# Altium PCB Interface Board.PcbDoc
Units mm, origin at the board's own origin, x right, y up, seen from the top; angles counter-clockwise.
Board outline 152.4 x 101.6 mm, 2 copper layers (Top Layer, Bottom Layer); 21 components, 170 nets, 84 pads, 0 vias.
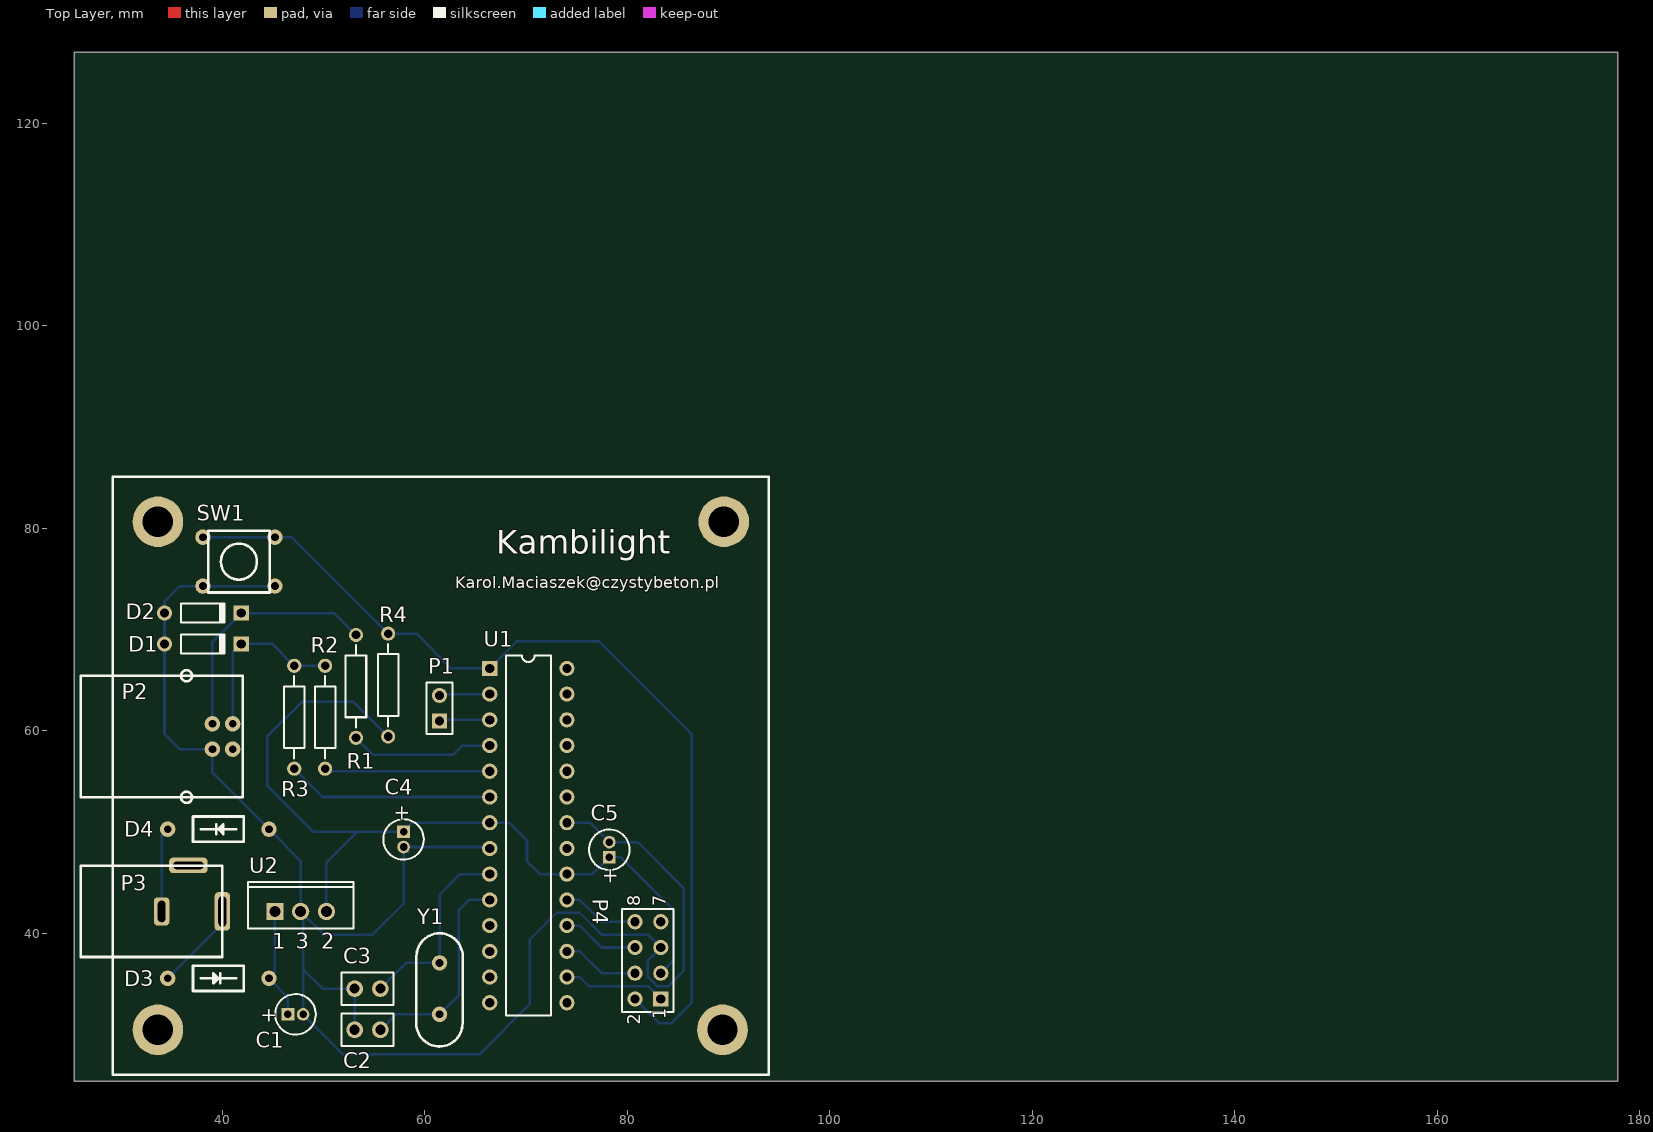
[diagram p0: Top Layer view]
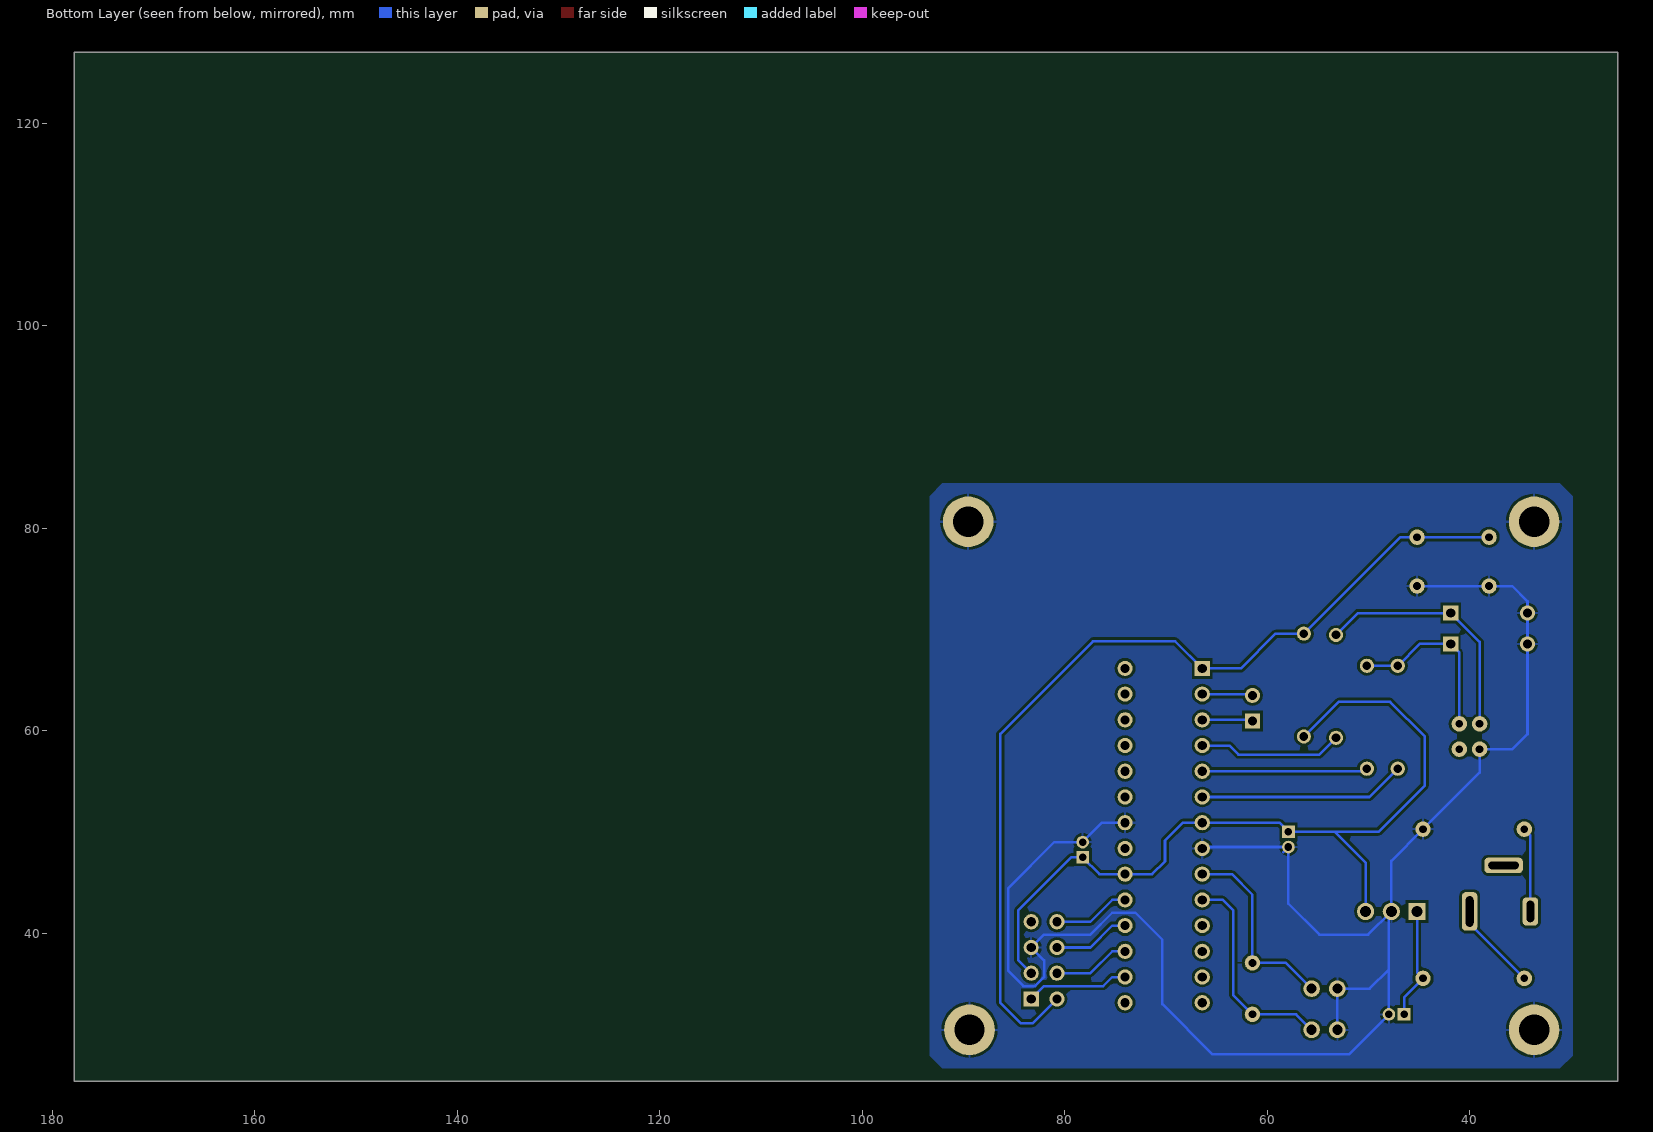
[diagram p1: Bottom Layer view, seen from below]

## Layer stack, top to bottom
Top Layer: signal copper 0.0356
Dielectric: dielectric 0.32, FR-4, Dk 4.8
Bottom Layer: signal copper 0.0356

## Board outline
25.4,25.4 177.8,25.4 177.8,127 25.4,127

## Design rules (kind name [scope] priority, off if disabled: settings)
Clearance [All] p1: gap=0.254
PolygonConnect [All] p1: connectstyle=Relief reliefconductorwidth=0.254 reliefentries=4 polygonreliefangle="90 Angle"
RoomDefinition "USB Circuit" [InComponentClass('USB Circuit')] p1: confinementstyle=ConfineIn formatcopy=TRUE lockcomponents=FALSE outline 25.4,25.4 94.488,25.4 94.488,85.471 25.4,85.471
RoomDefinition Reset [InComponentClass('Reset')] p2: confinementstyle=ConfineIn formatcopy=TRUE lockcomponents=FALSE outline 31.115,58.42 58.547,58.42 58.547,85.471 31.115,85.471
RoomDefinition Power [InComponentClass('Power')] p3: confinementstyle=ConfineIn formatcopy=TRUE lockcomponents=FALSE outline 25.4,28.067 54.229,28.067 54.229,53.213 25.4,53.213
RoutingVias [All] p1: holewidth=0.711 width=1.27 viastyle="Through Hole" minholewidth=0.711 minwidth=1.27 maxholewidth=0.711 maxwidth=1.27
SilkscreenOverComponentPads [All] p1: minsilkscreentomaskgap=0.254
SolderMaskExpansion [All] p1: expansion=0.102
Width [All] p1: maxlimit=0.254 minlimit=0.254 preferedwidth=0.254
27 further rules are at their usual default settings.

## Classes and differential pairs
component class Power: C1 D3 D4 P3 U2
component class Reset: R4 SW1
component class "USB Circuit": C2 C3 C4 C5 D1 D2 P1 P2 P4 R1 R2 R3 U1 Y1

## Components (designator, comment, footprint, x,y, rotation, side; value= is the part's Value field where it differs from the comment)
C1 "Cap Pol1" CAPPR1.5-4x5 47.244,32.004 r0 top
C2 "Cap" CAPR2.54-5.1x3.2 54.356,30.48 r180 top
C3 "Cap" CAPR2.54-5.1x3.2 54.356,34.544 r180 top
C4 "Cap Pol1" CAPPR1.5-4x5 57.912,49.276 r270 top
C5 "Cap Pol1" CAPPR1.5-4x5 78.232,48.26 r90 top
D1 "BZX79-C3V6" SOD27 38.1,68.58 r0 top
D2 "BZX79-C3V6" SOD27 38.1,71.628 r0 top
D3 "1N5817" 1N5817 39.624,35.56 r180 top
D4 "1N5817" 1N5817 39.624,50.292 r0 top
P1 "Header 2" HDR1X2 61.468,60.96 r90 top
P2 "USB B Socket" "USB B Socket" 34.036,59.436 r0 top
P3 "PWR Socket 6mm" "PWR Socket 6mm" 33.02,42.164 r0 top
P4 "Header 4X2" HDR2X4 83.312,33.528 r90 top
R1 "Res2" AXIAL-0.4 53.213,64.389 r270 top
R2 "Res2" AXIAL-0.4 50.165,61.341 r90 top
R3 "Res2" AXIAL-0.4 47.117,61.341 r270 top
R4 "Res2" AXIAL-0.4 56.388,64.516 r270 top
SW1 "Microswitch" "DIP Microswitch 6x6mm" 41.656,76.708 r0 top
U1 "ATmega8-16PI" 28P3 70.231,49.657 r270 top
U2 "L7805CV" TO220ABN 47.752,42.164 r0 top
Y1 "XTAL" "Crystal Oscillator" 61.468,34.544 r270 top

## Footprints (in the part's own frame and the unit in brackets; to place one, negate y for a bottom-side part, rotate by r counter-clockwise, add the part's x,y. Pads: shape width x height; smd on the part's side, far side on the other; paste and mask are expansions set on the pad)
1N5817 [mil]
  round 60 hole 30: A(196.85,0) K(-196.85,0)
  silkscreen extent -98,-49 98,49
28P3 [mm] "DIP; 28 Leads; Row Spacing 7.62 mm; Pitch 2.54 mm"
  rect 1.5x1.5 hole 0.9: 1(-16.51,-3.81)
  round 1.5 hole 0.9: 2(-13.97,-3.81) 3(-11.43,-3.81) 4(-8.89,-3.81) 5(-6.35,-3.81) 6(-3.81,-3.81) 7(-1.27,-3.81) 8(1.27,-3.81) 9(3.81,-3.81) 10(6.35,-3.81) 11(8.89,-3.81) 12(11.43,-3.81) 13(13.97,-3.81) 14(16.51,-3.81) 15(16.51,3.81) 16(13.97,3.81) 17(11.43,3.81) 18(8.89,3.81) 19(6.35,3.81) 20(3.81,3.81) 21(1.27,3.81) 22(-1.27,3.81) 23(-3.81,3.81) 24(-6.35,3.81) 25(-8.89,3.81) 26(-11.43,3.81) 27(-13.97,3.81) 28(-16.51,3.81)
  silkscreen extent -17.78,-2.22 17.78,2.22
AXIAL-0.4 [mm] "Axial Device, Thru-Hole; 2 Leads; 0.4 in Pin Spacing"
  round 1.4 hole 0.85: 1(-5.08,0) 2(5.08,0)
  silkscreen extent -4.06,-1.02 4.06,1.02
CAPPR1.5-4x5 [mm] "Capacitor, Electrolytic, Radial; Body 4 x 5 mm (Dia.xH typ); Pin Spacing 1.5 mm (typ)"
  rect 1.25x1.25 hole 0.75: 1(-0.75,0)
  round 1.25 hole 0.75: 2(0.75,0)
  silkscreen extent -2,-2 2,2
CAPR2.54-5.1x3.2 [mm] "Capacitor, Ceramic, Thru-Hole, Dipped Radial; Body 5.1 x 3.2 mm (WxT) Pin Spacing 2.54 mm (typ)"
  round 1.65 hole 1: 1(-1.27,0) 2(1.27,0)
  silkscreen extent -2.55,-1.6 2.55,1.6
"Crystal Oscillator" [mil]
  round 60 hole 30: 1(-100,0) 2(100,0)
  silkscreen extent -215,-91 225,90
"DIP Microswitch 6x6mm" [mil]
  round 60 hole 30: 1(-140,95) 1(140,95) 2(-140,-95) 2(140,-95)
  silkscreen extent -120,-120 120,120
HDR1X2 [mm] "Connector; Header; 2 Position"
  rect 1.5x1.5 hole 0.9: 1(0,0)
  round 1.5 hole 0.9: 2(2.54,0)
  silkscreen extent -1.27,-1.27 3.81,1.27
HDR2X4 [mm] "Connector; Header; 4x2 Position"
  rect 1.5x1.5 hole 0.9: 1(0,0)
  round 1.5 hole 0.9: 2(0,2.54) 3(2.54,0) 4(2.54,2.54) 5(5.08,0) 6(5.08,2.54) 7(7.62,0) 8(7.62,2.54)
  silkscreen extent -1.27,-1.27 8.89,3.81
"PWR Socket 6mm" [mm]
  rrect50% 1.524x3.8 hole 0.762 slot 3 at 90 deg: +(7,0)
  rrect50% 1.524x2.8 hole 0.762 slot 2.1 at 90 deg: -(1,0)
  rrect50% 3.8x1.524 hole 0.762 slot 3 at 0 deg: ""(3.65,4.55)
  silkscreen extent -7,-4.5 7,4.5
SOD27 [mm] "Diode, Axial; Body 4.3 x 1.9 mm (LxDia. max), Lead Dia. 0.56 mm (max)"
  round 1.5 hole 0.9: 1(-3.79,0)
  rect 1.5x1.5 hole 0.9: 2(3.79,0)
  silkscreen extent -2.15,-0.95 2.25,0.95
TO220ABN [mm] "TO, Thru-Hole, Vertical, Heatsink Mounted; 3 In-Line Leads; Pitch 2.54 mm; Pin sequence 1, 3, 2"
  rect 1.7x1.7 hole 1.1: 1(-2.54,0)
  round 1.7 hole 1.1: 2(2.54,0) 3(0,0)
  silkscreen extent -5.2,-1.7 5.2,2.9
"USB B Socket" [mil]
  round 60 hole 30: D+(196.85,49.21) D-(275.59,49.21) GND(196.85,-49.21) VCC(275.59,-49.21)
  silkscreen extent -315,-258 315,258

## Part data
C1 C4 C5: "Polarized Capacitor (Radial)"
C2 C3: "Capacitor"
D1 D2: "Voltage Regulator Diode"
P1: "Header, 2-Pin"
P4: "Header, 4-Pin, Dual row"
R1 R2 R3 R4: "Resistor"
U1: "8-Bit AVR Microcontroller with 8K Bytes of In-System Programmable Flash Memory"
U2: "Positive Voltage Regulator"
Y1: library part "Crystal Oscillator"

## Free pads (board coordinates)
  round 5 hole 3: 0(33.655,30.48) 1(33.655,80.645) 2(89.408,30.48) 3(89.535,80.645)

## Nets (pads, with @x,y where several pads share a name; then routed paths per layer and width w, separated by ;. In a path a pad name is that pad's centre, name@x,y a point inside that pad or via, vN(x,y) a via of type N, cw(c..) or ccw(c..) an arc to the next point about the centre after c; other vN are vias at no path point)
GND: C1.2 C2.2 C3.2 C4.2 C5.2 D1.1 D2.1 D4.A P2.GND P4.5 pad.0 pad.1 pad.2 pad.3 SW1.2 U1.8 U1.22 U2.3 | length 175.4
  Bottom Layer w0.254: SW1.2@45.212,74.295 38.1,74.295 35.814,74.295 34.31,72.791 D2.1 D1.1 34.31,59.67 35.794,58.186 P2.GND 39.036,55.88 D4.A 47.752,47.164 U2.3 ; C2.2 C3.2 49.899,34.544 47.994,36.449 ; 58.432,48.006 C4.2 ; U1.8 66.282,48.526 C4.2 ; U1.22 76.315,50.927 C5.2 81.038,49.01 85.598,44.45 85.598,36.322 84.074,34.798 82.931,34.798 82.042,35.687 82.042,37.338 P4.5 82.042,39.878 77.47,39.878 75.311,42.037 73.025,42.037 70.358,39.37 70.358,33.02 65.393,28.055 51.943,28.055 C1.2 47.994,36.449 ; U2.3 47.994,41.922 47.994,36.449 ; U2.3 50.038,39.878 54.864,39.878 57.912,42.926 C4.2
NetC1_1: C1.1 D3.K U2.1 | length 11.2
  Bottom Layer w0.254: U2.1 45.212,36.148 D3.K 46.494,33.69 C1.1
NetC2_1: C2.1 U1.10 Y1.2 | length 21
  Bottom Layer w0.254: C2.1 57.15,32.004 Y1.2 63.373,33.909 63.373,42.291 64.389,43.307 U1.10
NetC3_1: C3.1 U1.9 Y1.1 | length 19.4
  Bottom Layer w0.254: C3.1 58.166,37.084 Y1.1 61.468,43.815 63.5,45.847 U1.9
NetC6_1: 
NetC7_1: 
NetD1_2: D1.2 P2.D- R2.2 R3.1 | length 17.4
  Bottom Layer w0.254: P2.D- 41.036,67.726 D1.2 44.958,68.58 R3.1 R2.2
NetD2_2: D2.2 P2.D+ R1.1 | length 24.3
  Bottom Layer w0.254: P2.D+ 39.036,68.774 D2.2 51.054,71.628 R1.1
NetD3_A: D3.A P3.+ | length 8.8
  Bottom Layer w0.254: D3.A 40.02,40.956 P3.+
NetD4_K: D4.K P3.- | length 8.4
  Bottom Layer w0.254: P3.- 34.02,49.688 D4.K
NetP1_1: P1.1 U1.3 | length 5
  Bottom Layer w0.254: P1.1 61.595,61.087 U1.3
NetP1_2: P1.2 U1.2 | length 5
  Bottom Layer w0.254: P1.2 61.595,63.627 U1.2
NetP4_1: P4.1 U1.16 | length 10.2
  Bottom Layer w0.254: U1.16 75.311,35.687 76.2,34.798 82.042,34.798 P4.1
NetP4_2: P4.2 R4.1 SW1.1 U1.1 | length 92.5
  Bottom Layer w0.254: SW1.1@38.1,79.121 45.212,79.121 46.863,79.121 R4.1 59.182,69.596 62.611,66.167 U1.1 69.088,68.834 77.216,68.834 86.36,59.69 86.36,33.147 84.328,31.115 83.185,31.115 P4.2
NetP4_4: P4.4 U1.17 | length 7.6
  Bottom Layer w0.254: U1.17 75.311,38.227 77.47,36.068 P4.4
NetP4_6: P4.6 U1.18 | length 7.6
  Bottom Layer w0.254: U1.18 75.311,40.767 77.47,38.608 P4.6
NetP4_8: P4.8 U1.19 | length 7.6
  Bottom Layer w0.254: U1.19 75.311,43.307 77.47,41.148 P4.8
NetP5_1: 
NetP5_2: 
NetP5_4: 
NetP5_6: 
NetP5_8: 
NetPL00_1: 
NetPL00_2: 
NetPL00_3: 
NetPL01_1: 
NetPL01_2: 
NetPL01_3: 
NetPL02_1: 
NetPL02_2: 
NetPL02_3: 
NetPL03_1: 
NetPL03_2: 
NetPL03_3: 
NetPL04_1: 
NetPL04_2: 
NetPL04_3: 
NetPL05_1: 
NetPL05_2: 
NetPL05_3: 
NetPL06_1: 
NetPL06_2: 
NetPL06_3: 
NetPL07_1: 
NetPL07_2: 
NetPL07_3: 
NetPL08_1: 
NetPL08_2: 
NetPL08_3: 
NetPL09_1: 
NetPL09_2: 
NetPL09_3: 
NetPL10_1: 
NetPL10_2: 
NetPL10_3: 
NetPL11_1: 
NetPL11_2: 
NetPL11_3: 
NetPL12_1: 
NetPL12_2: 
NetPL12_3: 
NetPL13_1: 
NetPL13_2: 
NetPL13_3: 
NetPL14_1: 
NetPL14_2: 
NetPL14_3: 
NetPL15_1: 
NetPL15_2: 
NetPL15_3: 
NetPL16_1: 
NetPL16_2: 
NetPL16_3: 
NetPL17_1: 
NetPL17_2: 
NetPL17_3: 
NetPL18_1: 
NetPL18_2: 
NetPL18_3: 
NetPL19_1: 
NetPL19_2: 
NetPL19_3: 
NetPL20_1: 
NetPL20_2: 
NetPL20_3: 
NetR1_2: R1.2 U1.4 | length 14.3
  Bottom Layer w0.254: R1.2 54.864,57.658 62.865,57.658 63.754,58.547 U1.4
NetR2_1: R2.1 U1.5 | length 16.4
  Bottom Layer w0.254: R2.1 50.419,56.007 U1.5
NetR3_2: R3.2 U1.6 | length 20.5
  Bottom Layer w0.254: R3.2 49.911,53.467 U1.6
NetU3_2: 
NetU3_3: 
NetU3_4: 
NetU3_5: 
NetU3_6: 
NetU3_11: 
NetU3_12: 
NetU3_13: 
NetU3_14: 
NetU3_15: 
NetU3_23: 
NetU3_24: 
NetU3_25: 
NetU3_26: 
NetU3_27: 
NetU3_28: 
NetU4_2: 
NetU4_5: 
NetU4_6: 
NetU4_9: 
NetU4_12: 
NetU4_15: 
NetU4_16: 
NetU4_19: 
NetU6_2: 
NetU6_5: 
NetU6_6: 
NetU6_9: 
NetU6_12: 
NetU6_15: 
NetU6_16: 
NetU6_19: 
NetU8_2: 
NetU8_5: 
NetU8_6: 
NetU8_9: 
NetU8_12: 
NetU8_15: 
NetU8_16: 
NetU8_19: 
NetU10_2: 
NetU10_5: 
NetU10_6: 
NetU10_9: 
NetU10_12: 
NetU10_15: 
NetU10_16: 
NetU10_19: 
NetU12_2: 
NetU12_5: 
NetU12_6: 
NetU12_9: 
NetU12_12: 
NetU12_15: 
NetU12_16: 
NetU12_19: 
NetU14_2: 
NetU14_5: 
NetU14_6: 
NetU14_9: 
NetU14_12: 
NetU14_15: 
NetU14_16: 
NetU14_19: 
NetU16_2: 
NetU16_5: 
NetU16_6: 
NetU16_9: 
NetU16_12: 
NetU16_15: 
NetU16_16: 
NetU16_19: 
NetU18_2: 
NetU18_5: 
NetU18_6: 
NetU18_9: 
NetU18_12: 
NetU18_15: 
NetU18_16: 
NetU18_19: 
NetU19_11: 
VCC: C4.1 C5.1 P4.3 R4.2 U1.7 U1.20 U2.2 | length 84.8
  Bottom Layer w0.254: U2.2 50.292,46.99 53.328,50.026 ; R4.2 52.959,62.865 47.879,62.865 44.45,59.436 44.45,54.61 49.034,50.026 53.328,50.026 ; C4.1@58.432,50.546 C4.1 ; P4.3 84.582,37.338 84.582,42.291 79.363,47.51 C5.1 76.569,45.847 U1.20 71.374,45.847 70.104,47.117 70.104,49.149 68.326,50.927 U1.7 58.813,50.927 C4.1 ; 53.328,50.026 C4.1
pads on no net: P2.VCC P3. P4.7 U1.11 U1.12 U1.13 U1.14 U1.15 U1.21 U1.23 U1.24 U1.25 U1.26 U1.27 U1.28

## Polygon pours and split planes (outlines as drawn)
GND on Bottom Layer "Bottom Layer-No Net" (solid): 92.075,84.455 93.345,83.185 93.345,27.94 92.075,26.67 31.115,26.67 29.845,27.94 29.845,83.185 31.115,84.455

## Silkscreen, mask and mechanical layers (free items; w line width, h text height)
Top Overlay:
  lines w0.254: 29.21,26.035 93.98,26.035 93.98,85.09 29.21,85.09 29.21,26.035
  text "Kambilight" at 67.056,76.708 h4
  text "Karol.Maciaszek@czystybeton.pl" at 62.992,73.66 h2

## Text inside footprints (layer, text, board x,y; h text height)
C1: Top Overlay "+" at 43.769,31.254 h1.5
C4: Top Overlay "+" at 57.162,52.751 h1.5 r270
C5: Top Overlay "+" at 78.982,44.785 h1.5 r90
P4: Top Overlay "8" at 81.28,42.672 h1.27 r90; Top Overlay "7" at 83.82,42.672 h1.27 r90; Top Overlay "1" at 83.82,31.496 h1.27 r90; Top Overlay "2" at 81.28,30.988 h1.27 r90
U2: Top Overlay "3" at 47.252,38.489 h1.5; Top Overlay "2" at 49.792,38.489 h1.5; Top Overlay "1" at 44.962,38.489 h1.5